# Altium PCB PCB.PcbDoc
Units mm, origin at the board's own origin, x right, y up, seen from the top; angles counter-clockwise.
Board outline 48 x 36 mm, 2 copper layers (Top Layer, Bottom Layer); 9 components, 20 nets, 48 pads, 0 vias.
Unrouted connection lines stored in the file: 1.
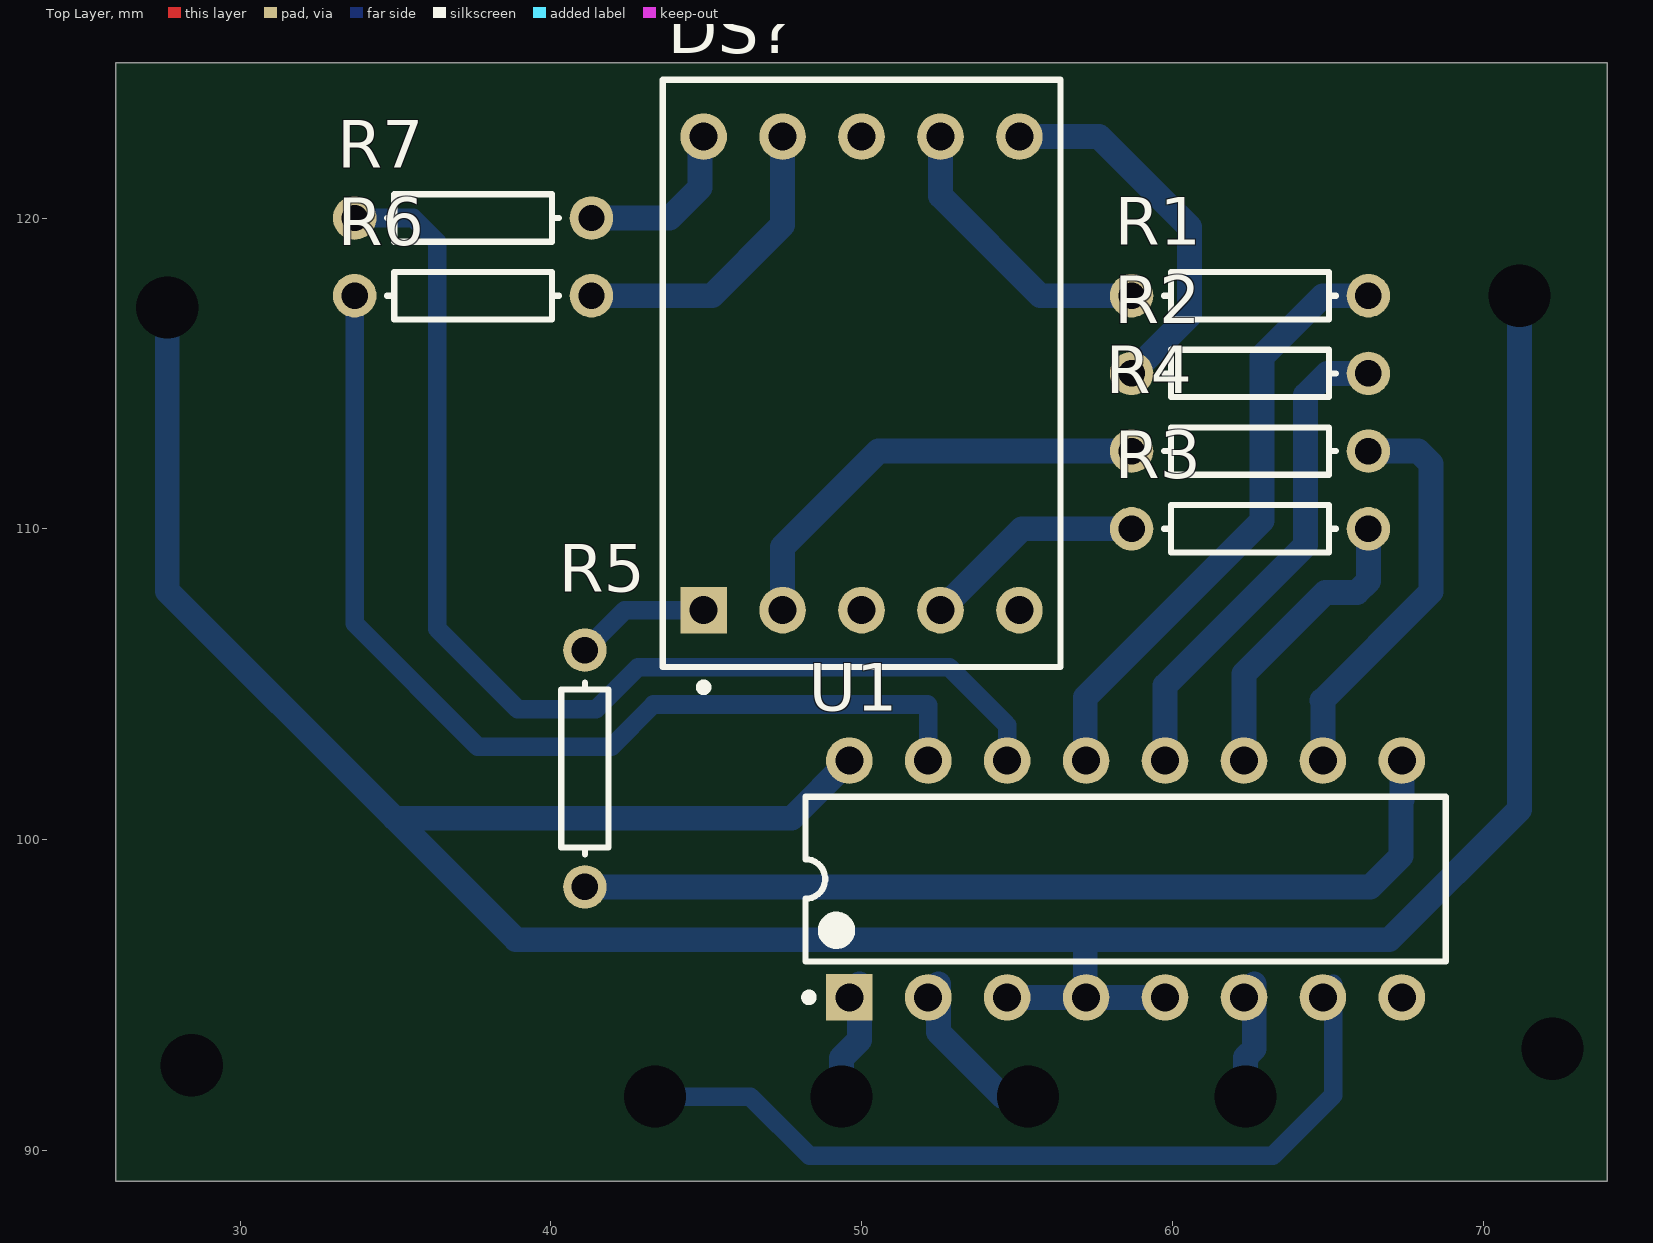
[diagram p0: Top Layer view]
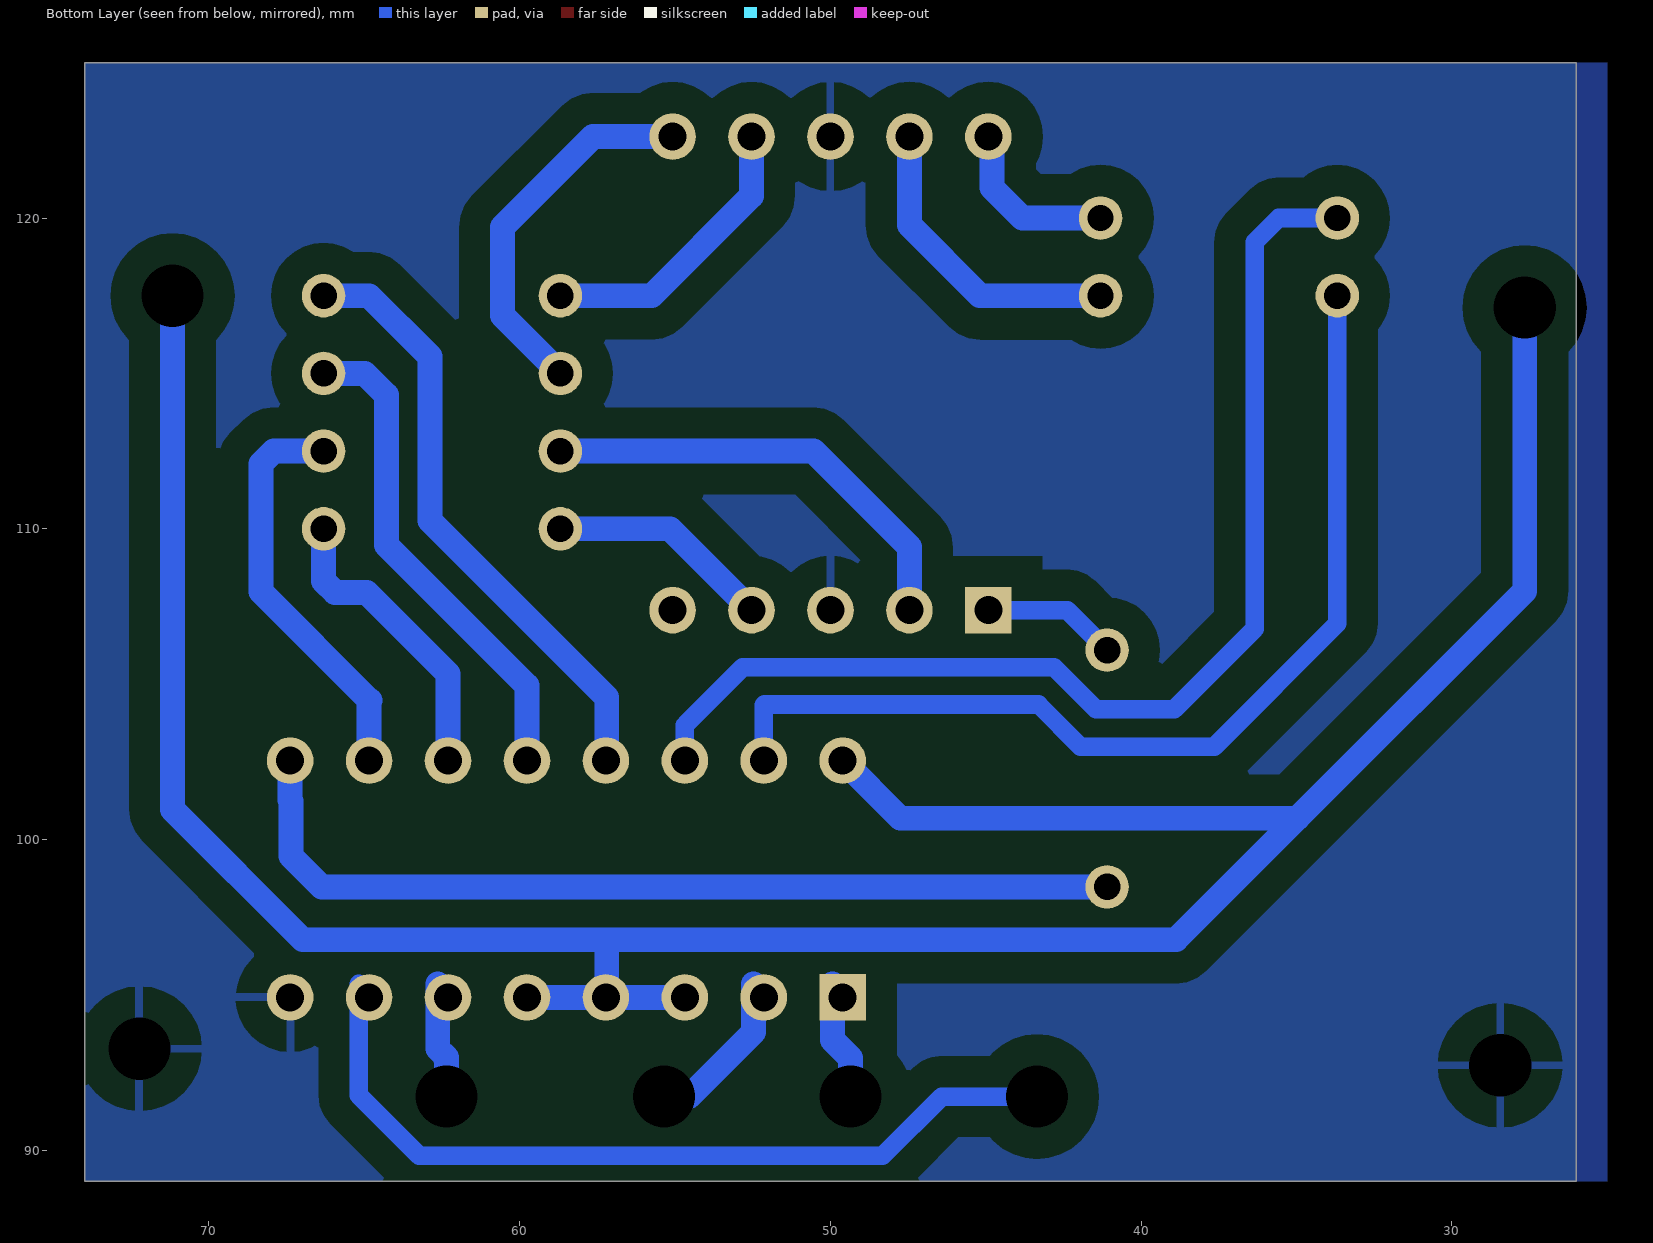
[diagram p1: Bottom Layer view, seen from below]

## Layer stack, top to bottom
Top Layer: signal copper 0.0356
Dielectric: dielectric 0.32, FR-4, Dk 4.8
Bottom Layer: signal copper 0.0356

## Board outline
74,89 26,89 26,125 74,125

## Design rules (kind name [scope] priority, off if disabled: settings)
Clearance Clearance_1 [IsRegion] p1: gap=1
Clearance [Not HasFootprint('LED')] p2: gap=0.6
PolygonConnect [All] p1: connectstyle=Relief reliefconductorwidth=0.254 reliefentries=4 polygonreliefangle="90 Angle"
RoutingVias [All] p1: holewidth=0.711 width=1.27 viastyle="Through Hole" minholewidth=0.711 minwidth=1.27 maxholewidth=0.711 maxwidth=1.27
SilkscreenOverComponentPads [All] p1: minsilkscreentomaskgap=0.254
SolderMaskExpansion SolderMaskExpansion_1 [HasFootprint('LED')] p1: expansion=0.15
SolderMaskExpansion [Not HasFootprint('LED')] p2: expansion=0.4
Width [All] p1: maxlimit=2 minlimit=0.6 preferedwidth=0.8
27 further rules are at their usual default settings.

## Components (designator, comment, footprint, x,y, rotation, side; value= is the part's Value field where it differs from the comment)
DS? "Dpy Blue-CC" H 50,115 r0 top
R1 "Res1" AXIAL-0.3 62.5,117.5 r180 top
R2 "Res1" AXIAL-0.3 62.5,115 r180 top
R3 "Res1" AXIAL-0.3 62.5,110 r180 top
R4 "Res1" AXIAL-0.3 62.5,112.5 r180 top
R5 "Res1" AXIAL-0.3 41.097,102.286 r90 top
R6 "Res1" AXIAL-0.3 37.5,117.5 r0 top
R7 "Res1" AXIAL-0.3 37.5,120 r0 top
U1 "DM74LS47N" N16E 58.496,98.73 r90 top

## Footprints (in the part's own frame and the unit in brackets; to place one, negate y for a bottom-side part, rotate by r counter-clockwise, add the part's x,y. Pads: shape width x height; smd on the part's side, far side on the other; paste and mask are expansions set on the pad)
AXIAL-0.3 [mm] "Axial Device, Thru-Hole; 2 Leads; 0.3 in Pin Spacing"
  round 1.4 hole 0.85: 1(-3.81,0) 2(3.81,0)
  silkscreen extent -2.77,-0.76 2.77,0.76
H [mm] "LED, 7-Segment Display, 14.2 mm, RHD; 10 Leads; Row Space 15.24 mm; Pitch 2.54 mm"
  rect 1.5x1.5 hole 0.9: 1(-5.08,-7.62)
  round 1.5 hole 0.9: 2(-2.54,-7.62) 3(0,-7.62) 4(2.54,-7.62) 5(5.08,-7.62) 6(5.08,7.62) 7(2.54,7.62) 8(0,7.62) 9(-2.54,7.62) 10(-5.08,7.62)
  silkscreen extent -6.4,-10.22 6.4,9.45, body extent -6.4,-9.45 6.4,9.45, height 8.25
N16E [mm] "DIP, 16-Leads, Row Spacing 7.62mm, Pitch 2.54mm, Body 19.3x6.35mm"
  rect 1.5x1.5 hole 0.9: 1(-3.81,8.89)
  round 1.5 hole 0.9: 2(-3.81,6.35) 3(-3.81,3.81) 4(-3.81,1.27) 5(-3.81,-1.27) 6(-3.81,-3.81) 7(-3.81,-6.35) 8(-3.81,-8.89) 9(3.81,-8.89) 10(3.81,-6.35) 11(3.81,-3.81) 12(3.81,-1.27) 13(3.81,1.27) 14(3.81,3.81) 15(3.81,6.35) 16(3.81,8.89)
  silkscreen extent -3.93,-10.3 2.65,10.31, body extent -3.6,-10.28 3.6,10.28, height 5.08

## Part data
DS?: "14.2 mm General Purpose Blue 7-Segment Display: CC, RH DP, Gray Surface"
R1 R2 R3 R4 R5 R6 R7: "Resistor"
U1: "BCD to 7-Segment Decoder/Driver with Open-Collector Output"

## Free pads (board coordinates)
  round 1.524 hole 2: 0(27.661,117.119) 1(28.448,92.735) 3(49.356,91.727) 4(55.356,91.727) 5(62.356,91.727) 6(72.238,93.269) 7(71.171,117.5) 8(43.356,91.727)

## Nets (pads, with @x,y where several pads share a name; then routed paths per layer and width w, separated by ;. In a path a pad name is that pad's centre, name@x,y a point inside that pad or via, vN(x,y) a via of type N, cw(c..) or ccw(c..) an arc to the next point about the centre after c; other vN are vias at no path point)
GND: DS?.3 DS?.8 pad.1 pad.6 U1.8 | length 0.2
  Bottom Layer w0.6: DS?.8 DS?.8@50.207,122.62
IN1: pad.8 U1.7 | length 27
  Bottom Layer w0.6: pad.8 46.423,91.727 48.323,89.827 63.233,89.827 65.176,91.77 U1.7@65.176,95.352
IN2: pad.3 U1.1 | length 3.9
  Bottom Layer w0.8: pad.3 49.356,92.967 49.936,93.548 U1.1@49.936,95.352
IN3: pad.4 U1.2 | length 5.3
  Bottom Layer w0.8: U1.2@52.476,95.352 52.476,93.802 54.551,91.727 pad.4
IN4: pad.5 U1.6 | length 3.7
  Bottom Layer w0.8: pad.5 62.356,92.988 62.636,93.269 U1.6@62.636,95.352
NetDS?_1: DS?.1 R5.2 | length 4.4
  Bottom Layer w0.6: R5.2 42.381,107.38 DS?.1
NetDS?_2: DS?.2 R4.2 | length 14.5
  Bottom Layer w0.8: DS?.2 47.46,109.411 50.549,112.5 R4.2
NetDS?_4: DS?.4 R3.2 | length 7.2
  Bottom Layer w0.8: DS?.4 55.16,110 R3.2
NetDS?_6: DS?.6 R2.2 | length 12.2
  Bottom Layer w0.8: DS?.6 57.644,122.62 60.554,119.71 60.554,116.864 R2.2
NetDS?_7: DS?.7 R1.2 | length 9.4
  Bottom Layer w0.8: DS?.7 52.54,120.713 55.753,117.5 R1.2
NetDS?_9: DS?.9 R6.2 | length 9.9
  Bottom Layer w0.8: R6.2 45.186,117.5 47.46,119.774 DS?.9
NetDS?_10: DS?.10 R7.2 | length 5.6
  Bottom Layer w0.8: R7.2 43.825,120 44.806,120.98 44.806,122.506 DS?.10
NetR1_1: R1.1 U1.13 | length 19.6
  Bottom Layer w0.8: U1.13 57.201,102.565 57.201,104.572 62.887,110.258 62.887,115.542 64.846,117.5 R1.1
NetR2_1: R2.1 U1.12 | length 15.9
  Bottom Layer w0.8: U1.12 59.766,104.953 64.287,109.474 64.287,114.3 64.987,115 R2.1
NetR3_1: R3.1 U1.11 | length 9.7
  Bottom Layer w0.8: U1.11 62.306,105.334 64.922,107.95 65.938,107.95 66.31,108.322 R3.1
NetR4_1: R4.1 U1.10 | length 13.2
  Bottom Layer w0.8: U1.10 64.846,104.445 64.821,104.47 68.326,107.975 68.326,112.09 67.916,112.5 R4.1
NetR5_1: R5.1 U1.9 | length 29.8
  Bottom Layer w0.8: R5.1 66.37,98.476 67.361,99.466 67.361,101.244 67.386,101.27 U1.9
NetR6_1: R6.1 U1.15 | length 33
  Bottom Layer w0.6: R6.1 33.69,106.95 37.649,102.991 41.952,102.991 43.304,104.343 52.121,104.343 ; U1.15 52.146,104.318
NetR7_1: R7.1 U1.14 | length 37.3
  Bottom Layer w0.6: R7.1 35.575,120 36.347,119.228 36.347,106.782 38.938,104.191 41.455,104.191 42.807,105.543 52.826,105.543 54.661,103.708 ; U1.14 54.686,103.683
VCC: pad.0 pad.7 U1.3 U1.4 U1.5 U1.16 | length 97.9
  Bottom Layer w0.8: pad.0 27.661,108.001 34.976,100.686 ; U1.16 47.752,100.686 34.976,100.686 ; U1.3 U1.4@57.201,94.92 ; U1.5 U1.4 U1.4@57.201,94.92 ; pad.7 71.171,100.965 66.982,96.776 57.15,96.776 ; 34.976,100.686 38.886,96.776 57.15,96.776 ; 57.15,96.776 57.201,96.725 U1.4@57.201,94.92
pads on no net: DS?.5

## Polygon pours and split planes (outlines as drawn)
GND on Bottom Layer "GND" (solid, remove dead copper, pour order 5): 74,125 74,89 25,89 25,125